# Altium PCB base_tiempo.PcbDoc (part 3 of 3)
Units mil, origin at the board's own origin, x right, y up, seen from the top; angles counter-clockwise.
Board outline 9832.52 x 6640 mil, 2 copper layers (Top Layer, Bottom Layer); 185 components, 479 nets, 1064 pads, 206 vias.
Unrouted connection lines stored in the file: 3.
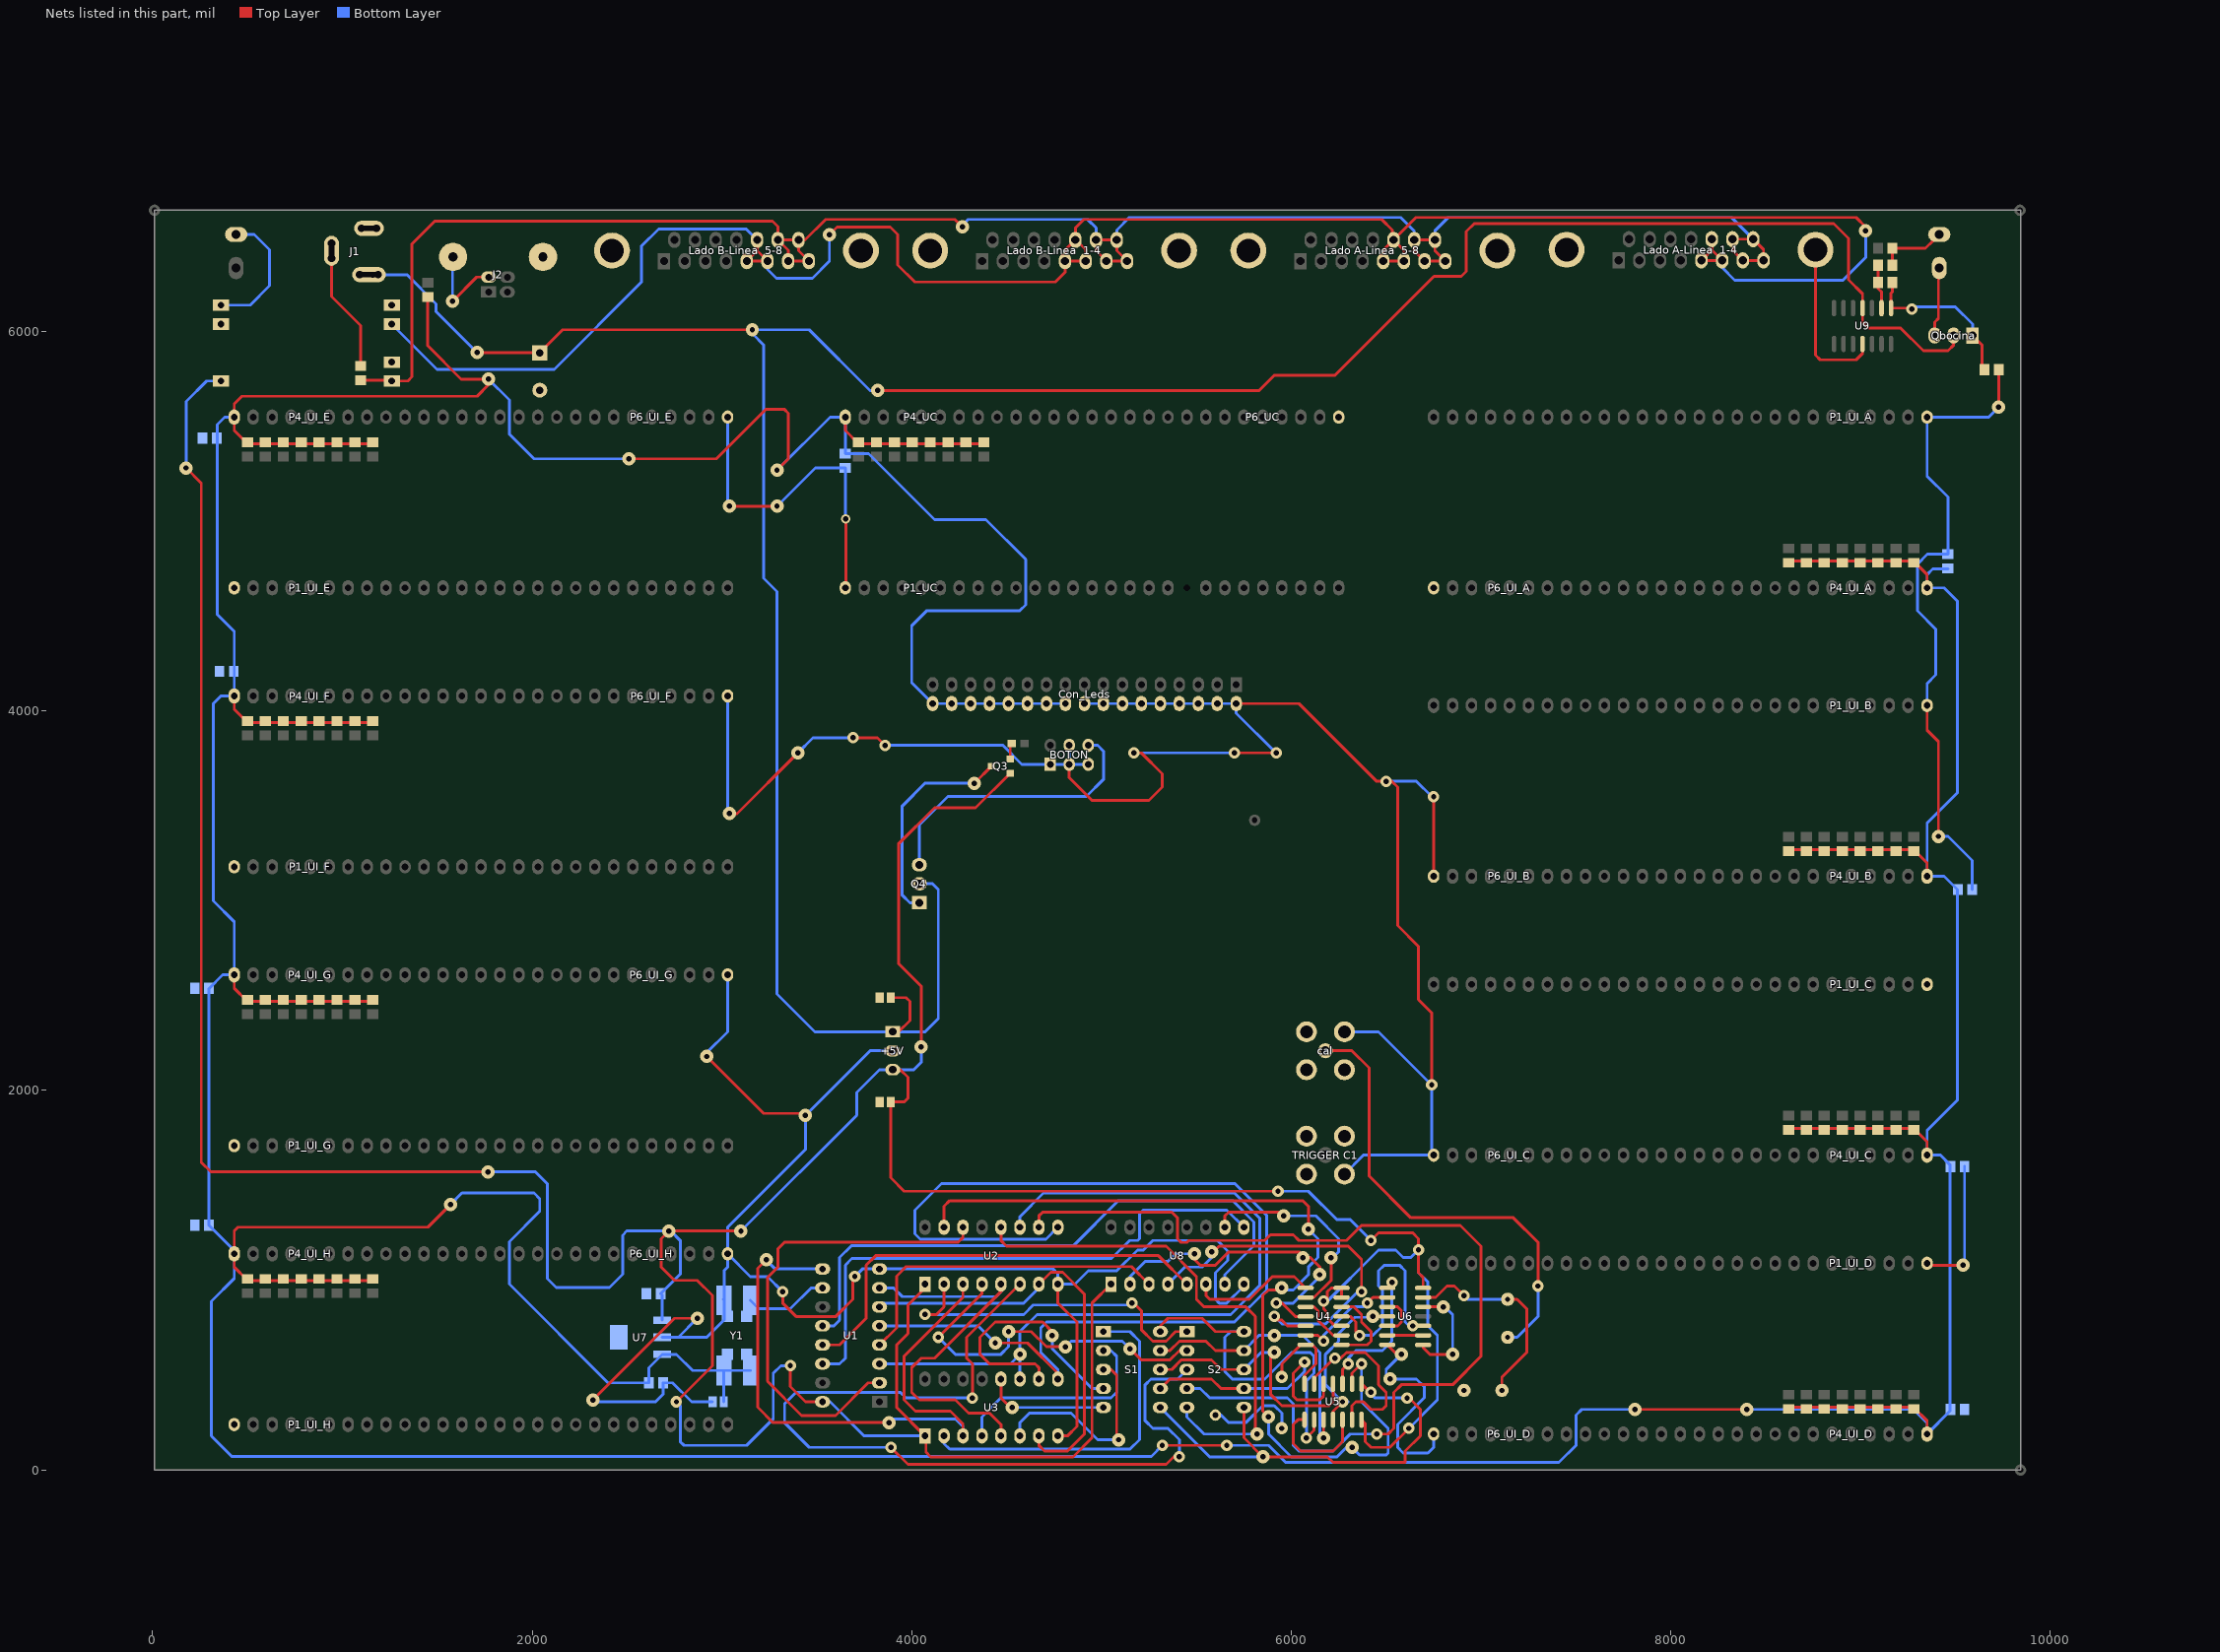
[diagram p3: the nets of this part, all layers, seen from the top]

## Via types
v1: diameter 70, hole 28, Top Layer to Bottom Layer, 157 vias
v2: diameter 60, hole 28, Top Layer to Bottom Layer, 46 vias
v3: diameter 65, hole 28, Top Layer to Bottom Layer, 2 vias
v4: diameter 50, hole 28, Top Layer to Bottom Layer, 1 vias

## Nets (pads, with @x,y where several pads share a name; then routed paths per layer and width w, separated by ;. In a path a pad name is that pad's centre, name@x,y a point inside that pad or via, vN(x,y) a via of type N, cw(c..) or ccw(c..) an arc to the next point about the centre after c; other vN are vias at no path point) (continued)
+3.3V: C5.1 C_Osc.1 CAL1_UC.1 CAL1_UI_A.1 CAL1_UI_B.1 CAL1_UI_C.1 CAL1_UI_D.1 CAL1_UI_E.1 CAL1_UI_F.1 CAL1_UI_G.1 CAL1_UI_H.1 Con_Leds.20 Con_Leds.22 Con_Leds.24 Con_Leds.26 Con_Leds.28 Con_Leds.30 Con_Leds.32 Con_Leds.34 P4_UC.9 P4_UI_A.9 P4_UI_B.9 P4_UI_C.9 P4_UI_D.9 P4_UI_E.9 P4_UI_F.9 P4_UI_G.9 P4_UI_H.9 pad.2@3029.58,609.11 R1_UC.2 R1_UI_A.2 R1_UI_B.2 R1_UI_C.2 R1_UI_D.2 R1_UI_E.2 R1_UI_F.2 R1_UI_G.2 R1_UI_H.2 R2_UC.2 R2_UI_A.2 R2_UI_B.2 R2_UI_C.2 R2_UI_D.2 R2_UI_E.2 R2_UI_F.2 R2_UI_G.2 R2_UI_H.2 R3_UC.2 R3_UI_A.2 R3_UI_B.2 R3_UI_C.2 R3_UI_D.2 R3_UI_E.2 R3_UI_F.2 R3_UI_G.2 R3_UI_H.2 R4_UC.2 R4_UI_A.2 R4_UI_B.2 R4_UI_C.2 R4_UI_D.2 R4_UI_E.2 R4_UI_F.2 R4_UI_G.2 R4_UI_H.2 R5_UC.2 R5_UI_A.2 R5_UI_B.2 R5_UI_C.2 R5_UI_D.2 R5_UI_E.2 R5_UI_F.2 R5_UI_G.2 R5_UI_H.2 R6_UC.2 R6_UI_A.2 R6_UI_B.2 R6_UI_C.2 R6_UI_D.2 R6_UI_E.2 R6_UI_F.2 R6_UI_G.2 R6_UI_H.2 R7_UC.2 R7_UI_A.2 R7_UI_B.2 R7_UI_C.2 R7_UI_D.2 R7_UI_E.2 R7_UI_F.2 R7_UI_G.2 R7_UI_H.2 R8_UC.2 R8_UI_A.2 R8_UI_B.2 R8_UI_C.2 R8_UI_D.2 R8_UI_E.2 R8_UI_F.2 R8_UI_G.2 R8_UI_H.2 R_PU_USB.2 U7.3 Y1.1 Y1.4 | length 40338
  Top Layer w15: P4_UI_G.9@429.58,2609.11 429.58,2538.64 495.65,2472.58 499.58,2468.64 593.87,2468.64 876.72,2468.64 971.01,2468.64 R4_UI_G.2@1159.58,2468.64 ; P4_UI_F.9@429.58,4079.11 429.58,4008.64 495.65,3942.58 499.58,3938.64 688.15,3938.64 782.44,3938.64 876.72,3938.64 971.01,3938.64 R4_UI_F.2@1159.58,3938.64 ; R4_UI_H.2@1159.58,998.64 782.44,998.64 593.87,998.64 499.58,998.64 495.65,1002.58 429.58,1068.64 P4_UI_H.9@429.58,1139.11 429.58,1259.11 449.58,1279.11 1449.58,1279.11 v1(1569.58,1399.11) ; R4_UI_E.2@1159.58,5408.64 971.01,5408.64 876.72,5408.64 782.44,5408.64 593.87,5408.64 499.58,5408.64 495.65,5412.58 429.58,5478.64 P4_UI_E.9@429.58,5549.11 429.58,5619.11 469.58,5659.11 1709.58,5659.11 1769.58,5719.11 v1(1769.58,5749.11) 1625.89,5749.11 1449.58,5925.42 R_PU_USB.2@1449.58,6181.71 R_PU_USB.2@1449.58,6189.58 ; v1(2509.58,5329.11) 2969.58,5329.11 3229.58,5589.11 3329.58,5589.11 3349.58,5569.11 3349.58,5329.11 v1(3289.58,5269.11) ; P4_UC.9@3649.58,5549.11 3649.58,5478.64 3715.65,5412.58 3719.58,5408.64 3813.87,5408.64 3908.15,5408.64 4002.44,5408.64 4096.72,5408.64 4285.3,5408.64 R4_UC.2@4379.58,5408.64 ; v2(5319.58,129.11) v2(5659.58,129.11) ; v1(7809.58,319.11) v1(8399.58,319.11) ; R4_UI_D.2@8619.58,329.58 8996.72,329.58 9279.58,329.58 9283.52,325.65 9349.58,259.58 P4_UI_D.9@9349.58,189.11 ; R4_UI_C.2@8619.58,1799.58 8713.87,1799.58 8808.15,1799.58 8902.44,1799.58 8996.72,1799.58 9091.01,1799.58 9279.58,1799.58 9283.52,1795.65 9349.58,1729.58 P4_UI_C.9@9349.58,1659.11 ; R4_UI_B.2@8619.58,3269.58 8713.87,3269.58 8808.15,3269.58 9091.01,3269.58 9279.58,3269.58 9283.52,3265.65 9349.58,3199.58 P4_UI_B.9@9349.58,3129.11 ; R4_UI_A.2@8619.58,4789.58 8713.87,4789.58 8808.15,4789.58 8902.44,4789.58 8996.73,4789.58 9091.01,4789.58 9185.3,4789.58 9279.58,4789.58 9349.58,4719.58 P4_UI_A.9@9349.58,4649.11
  Bottom Layer w15: P4_UI_E.9@429.58,5549.11 379.58,5549.11 339.58,5509.11 339.58,4509.11 429.58,4419.11 P4_UI_F.9@429.58,4079.11 359.58,4079.11 319.58,4039.11 319.58,2999.11 429.58,2889.11 P4_UI_G.9@429.58,2609.11 369.58,2609.11 296.98,2536.51 CAL1_UI_H.1@296.98,1289.11 429.58,1156.51 P4_UI_H.9@429.58,1139.11 429.58,1009.11 309.58,889.11 309.58,179.11 417.08,71.61 5262.08,71.61 v2(5319.58,129.11) ; v1(1569.58,1399.11) 1629.58,1459.11 2009.58,1459.11 2039.58,1429.11 2039.58,1363.58 1879.58,1203.58 1879.58,979.11 2399.58,459.11 C5.1@2613.93,459.11 2613.93,538.73 U7.3@2683.76,608.56 2760.13,608.56 2844.62,524.07 Y1.1@3010.68,524.07 ; v1(1769.58,5749.11) 1879.58,5639.11 1879.58,5459.11 2009.58,5329.11 v1(2509.58,5329.11) ; C_Osc.1@3009.11,359.11 3009.11,522.5 Y1.1@3010.68,524.07 ; Y1.4@3148.48,524.07 Y1.1@3010.68,524.07 ; v1(3289.58,5269.11) 3569.58,5549.11 P4_UC.9@3649.58,5549.11 CAL1_UC.1@3649.58,5356.51 3772.18,5356.51 4119.58,5009.11 4389.58,5009.11 4599.58,4799.11 4599.58,4559.11 4569.58,4529.11 4079.58,4529.11 3999.58,4449.11 3999.58,4149.11 Con_Leds.34@4109.58,4039.11 Con_Leds.32@4209.58,4039.11 Con_Leds.30@4309.58,4039.11 Con_Leds.28@4409.58,4039.11 Con_Leds.26@4509.58,4039.11 Con_Leds.24@4609.58,4039.11 Con_Leds.22@4709.58,4039.11 Con_Leds.20@4809.58,4039.11 ; v2(5659.58,129.11) 5879.58,129.11 5969.58,39.11 7409.58,39.11 7499.58,129.11 7499.58,289.11 7529.58,319.11 v1(7809.58,319.11) ; v1(8399.58,319.11) 9279.58,319.11 9349.58,249.11 P4_UI_D.9@9349.58,189.11 9469.58,309.11 9469.58,319.11 9469.58,1609.11 9419.58,1659.11 P4_UI_C.9@9349.58,1659.11 9349.58,1789.11 9509.58,1949.11 9509.58,3059.11 9439.58,3129.11 P4_UI_B.9@9349.58,3129.11 9349.58,3409.11 9509.58,3569.11 9509.58,4579.11 9439.58,4649.11 P4_UI_A.9@9349.58,4649.11 9349.58,4719.11 9379.58,4749.11 CAL1_UI_A.1@9459.58,4749.11
/B0: S1.1 U3.2 | length 1833.8
  Bottom Layer w15: U3.2@4169.58,179.11 4169.58,139.11 4199.58,109.11 5149.58,109.11 5199.58,159.11 5199.58,679.11 5149.58,729.11 S1.1@5009.58,729.11
/B1: S1.2 U3.4 | length 1136.3
  Bottom Layer w15: U3.4@4369.58,179.11 4369.58,279.11 4469.58,379.11 5049.58,379.11 5079.58,409.11 5079.58,599.11 5049.58,629.11 S1.2@5009.58,629.11
/B2: S1.3 U3.6 | length 1085.3
  Top Layer w15: S1.3@5009.58,529.11 5049.58,529.11 5079.58,499.11 5079.58,169.11 v1(5089.58,159.11)
  Bottom Layer w15: U3.6@4569.58,179.11 4569.58,249.11 4619.58,299.11 4839.58,299.11 4979.58,159.11 v1@5079.58,159.11
/B3: S1.4 U3.10 | length 1369.8
  Top Layer w15: U3.10@4669.58,479.11 4669.58,539.11 4649.58,559.11 4409.58,559.11 4359.58,609.11 4359.58,699.11 4439.58,779.11 4689.58,779.11 4739.58,729.11 v1(4739.58,709.11)
  Bottom Layer w15: v1(4739.58,709.11) 4739.58,639.11 4949.58,429.11 S1.4@5009.58,429.11
/B4: S1.5 U3.12 | length 660.7
  Top Layer w15: U3.12@4469.58,479.11 4469.58,379.11 4519.58,329.11 v1(4529.58,329.11)
  Bottom Layer w15: v1(4529.58,329.11) S1.5@5009.58,329.11
B0: S2.1 U2.2 | length 1807.7
  Top Layer w15: v2(4069.58,819.11) 4129.58,819.11 4169.58,859.11 U2.2@4169.58,979.11 ; v2@5169.58,879.11 5209.58,839.11 5209.58,739.11 5269.58,679.11 5339.58,679.11 5389.58,729.11 S2.1@5449.58,729.11
  Bottom Layer w15: v2@4069.58,829.11 4079.58,819.11 4589.58,819.11 4639.58,869.11 5159.58,869.11 v2@5169.58,879.11
  other v2: 5159.58,879.11
B1: S2.2 U2.4 | length 1926.8
  Top Layer w15: v2(4139.58,699.11) 4369.58,929.11 U2.4@4369.58,979.11 ; v1(4509.58,729.11) 4629.58,729.11 4709.58,649.11 v1(4809.58,649.11) ; v1(5149.58,639.11) 5209.58,579.11 5359.58,579.11 5409.58,629.11 S2.2@5449.58,629.11
  Bottom Layer w15: v2(4139.58,699.11) 4229.58,609.11 4469.58,609.11 4509.58,649.11 v1(4509.58,729.11) ; v1(4809.58,649.11) 4839.58,679.11 5109.58,679.11 v1(5149.58,639.11)
B2: S2.3 U2.6 | length 4797.9
  Top Layer w15: v2(3889.58,119.11) 3979.58,29.11 5339.58,29.11 5379.58,69.11 v2(5409.58,69.11) ; v2(4319.58,379.11) 4319.58,559.11 4289.58,589.11 4289.58,699.11 U2.6@4569.58,979.11
  Bottom Layer w15: v2(3889.58,119.11) 3459.58,119.11 3329.58,249.11 3329.58,349.11 3389.58,409.11 3939.58,409.11 3969.58,379.11 v2(4319.58,379.11) ; v2(5409.58,69.11) 5409.58,159.11 5349.58,219.11 5269.58,219.11 5229.58,259.11 5229.58,449.11 5259.58,479.11 5399.58,479.11 S2.3@5449.58,529.11
B3: S2.4 U2.10 | length 5350.7
  Top Layer w15: U2.10@4669.58,1279.11 4669.58,1339.11 4689.58,1359.11 5369.58,1359.11 5399.58,1329.11 5399.58,1219.11 5419.58,1199.11 5449.58,1199.11 5459.58,1209.11 5859.58,1209.11 5889.58,1239.11 6009.58,1239.11 6039.58,1209.11 6289.58,1209.11 6369.58,1289.11 6889.58,1289.11 6999.58,1179.11 6999.58,599.11 6849.58,449.11 6579.58,449.11 6539.58,409.11 6539.58,219.11 6509.58,189.11 v2@6459.58,189.11
  Bottom Layer w15: S2.4@5449.58,429.11 5519.58,429.11 5569.58,379.11 5979.58,379.11 6009.58,349.11 6009.58,129.11 6039.58,99.11 6219.58,99.11 6309.58,189.11 v2@6459.58,189.11
  other v2: 6449.58,189.11
B4: S2.5 U2.12 | length 2723.3
  Top Layer w15: U2.12@4469.58,1279.11 4469.58,1209.11 4499.58,1179.11 5339.58,1179.11 5499.58,1019.11 5499.58,899.11 5539.58,859.11 5759.58,859.11 5809.58,809.11 v1@5809.58,189.11
  Bottom Layer w15: S2.5@5449.58,329.11 5449.58,279.11 5539.58,189.11 v1(5819.58,189.11)
B_0: U1.9 U2.3 U3.3 | length 3486.9
  Top Layer w15: v1(3232.58,1107.11) 3187.58,1062.11 3187.58,330.11 3268.58,249.11 v1(3879.58,249.11) ; U3.3@4269.58,179.11 4269.58,242.11 4202.58,309.11 4019.58,309.11 3959.58,369.11 3959.58,599.11 4269.58,909.11 U2.3@4269.58,979.11
  Bottom Layer w15: v1(3232.58,1107.11) 3280.58,1059.11 U1.9@3529.58,1059.11 ; v1(3879.58,249.11) v1@3899.58,269.11 ; v1@3879.58,269.11 v1@3899.58,269.11 ; U3.3@4269.58,179.11 4269.58,229.11 4229.58,269.11 v1@3899.58,269.11
B_1: U1.7 U2.5 U3.5 | length 2116.5
  Top Layer w15: U3.5@4469.58,179.11 4469.58,239.11 4409.58,299.11 4299.58,299.11 4229.58,369.11 4039.58,369.11 3999.58,409.11 3999.58,539.11 4049.58,589.11 4119.58,589.11 4469.58,939.11 U2.5@4469.58,979.11
  Bottom Layer w15: U1.7@3829.58,959.11 3903.58,959.11 3949.58,913.11 4444.58,913.11 4469.58,938.11 U2.5@4469.58,979.11
B_2: U1.6 U2.7 U3.7 | length 2292.1
  Top Layer w15: U3.7@4669.58,179.11 4669.58,129.11 4699.58,99.11 4819.58,99.11 4909.58,189.11 4909.58,926.61 4794.58,1041.61 4732.08,1041.61 U2.7@4669.58,979.11
  Bottom Layer w15: U1.6@3829.58,859.11 3849.58,879.11 4589.58,879.11 4669.58,959.11 U2.7@4669.58,979.11
B_3: U1.5 U2.9 U3.9 | length 5942.5
  Top Layer w15: v1(4439.58,669.11) 4609.58,669.11 4769.58,509.11 U3.9@4769.58,479.11
  Bottom Layer w15: U1.5@3829.58,759.11 4349.58,759.11 v1(4439.58,669.11) ; U3.9@4769.58,479.11 4769.58,529.11 4679.58,619.11 4679.58,749.11 4709.58,779.11 5699.58,779.11 5869.58,949.11 5869.58,1342.11 5702.58,1509.11 4156.58,1509.11 4016.58,1369.11 4016.58,1244.11 4044.58,1216.11 4706.58,1216.11 U2.9@4769.58,1279.11
B_4: pad.2@3129.58,609.11 pad.2@3129.58,809.11 U1.3 U2.11 U3.11 | length 4153.5
  Bottom Layer w15: U1.3@3829.58,559.11 4519.58,559.11 v1(4569.58,609.11) ; U3.11@4569.58,479.11 4569.58,729.11 4659.58,819.11 5679.58,819.11 5832.58,972.11 5832.58,1326.61 5700.08,1459.11 4694.58,1459.11 4569.58,1334.11 U2.11@4569.58,1279.11
B_5: U1.2 U2.14 | length 2510.7
  Top Layer w15: U1.2@3829.58,459.11 3769.58,459.11 3597.58,287.11 3419.59,287.11 3239.58,467.11 3239.58,1014.59 3293.91,1068.92 3293.91,1164.85 3329.17,1200.11 4244.58,1200.11 4269.58,1225.11 U2.14@4269.58,1279.11
B_6: U1.4 U8.3 | length 1788.8
  Top Layer w15: U1.4@3829.58,659.11 3919.58,749.11 3919.58,1021.61 3969.58,1071.61 5157.08,1071.61 U8.3@5249.58,979.11
B_7: U1.13 U8.5 | length 2340.8
  Top Layer w15: U1.13@3529.58,659.11 3619.58,659.11 3759.58,799.11 3759.58,1079.11 3809.58,1129.11 5299.58,1129.11 U8.5@5449.58,979.11
B_8: U1.12 U8.7 | length 3177.5
  Bottom Layer w15: U1.12@3529.58,759.11 3589.58,759.11 3619.58,789.11 3619.58,1119.11 3681.58,1181.11 4850.58,1181.11 5088.58,1419.11 5690.58,1419.11 5802.58,1307.11 5802.58,1182.11 5649.58,1029.11 U8.7@5649.58,979.11
B_9: U1.14 U8.9 | length 2956
  Bottom Layer w15: U1.14@3529.58,559.11 3619.58,559.11 3649.58,589.11 3649.58,1079.11 3684.58,1114.11 5052.58,1114.11 5147.58,1209.11 5189.58,1209.11 5199.58,1219.11 5199.58,1349.11 5219.58,1369.11 5659.58,1369.11 U8.9@5749.58,1279.11
BOCINA: BOCINA.2B Qbocina.3 | length 303.8
  Top Layer w15: Qbocina.3@9389.58,5979.11 9389.58,6049.11 9409.58,6069.11 9409.58,6274.62
CLK: U1.10 Y1.3 | length 445.3
  Bottom Layer w15: Y1.3@3148.48,894.15 3193.52,849.11 3359.58,849.11 3469.58,959.11 U1.10@3529.58,959.11
GND: "Lado A-Linea  1-4.16" "Lado A-Linea  1-4.17" "Lado A-Linea  5-8.16" "Lado A-Linea  5-8.17" "Lado B-Linea  1-4.16" "Lado B-Linea  1-4.17" "Lado B-Linea  5-8.16" "Lado B-Linea  5-8.17" "TRIGGER C1.2" "TRIGGER C1.3" "TRIGGER C1.4" "TRIGGER C1.5" +5V.2 BOCINA.1A BOTON.1 BOTON.2 BOTON.3 BOTON.5 C1.2 C2.2 C3.2 C4.2 C5.2 C_Osc.2 CAL1_UC.2 CAL1_UI_A.2 CAL1_UI_B.2 CAL1_UI_C.2 CAL1_UI_D.2 CAL1_UI_E.2 CAL1_UI_F.2 CAL1_UI_G.2 CAL1_UI_H.2 cal.2 cal.3 cal.4 cal.5 CENTRADA.2 Con_Leds.2 Con_Leds.4 Con_Leds.6 Con_Leds.8 Con_Leds.10 Con_Leds.12 Con_Leds.14 Con_Leds.16 Con_Leds.18 J1.2 J1.2A J1.2B J1.3 J1.3A J1.3B J2.4 J2.5 J2.6 J_3.1 P1_UC.1 P1_UI_A.1 P1_UI_B.1 P1_UI_C.1 P1_UI_D.1 P1_UI_E.1 P1_UI_F.1 P1_UI_G.1 P1_UI_H.1 P6_UC.1 P6_UI_A.1 P6_UI_B.1 P6_UI_C.1 P6_UI_D.1 P6_UI_E.1 P6_UI_F.1 P6_UI_G.1 P6_UI_H.1 pad.2@3029.58,809.11 pad.2@3649.58,4649.11 pad.2@5599.58,289.11 pad.4 pad.7 pad.10@6749.58,4649.11 pad.13@9349.58,4029.11 pad.16@6749.58,3129.11 pad.17@942.73,6399.11 pad.18@942.73,6409.11 pad.19 pad.20@942.73,6425.72 pad.21@942.73,6429.11 pad.22 pad.23 pad.24@1119.58,6543.83 pad.25@1129.58,6543.83 pad.26 pad.27@1149.58,6543.83 pad.28@1159.58,6543.83 pad.31 pad.34 pad.37 pad.40 pad.42 pad.45 pad.47 pad.50 r9.2 r10.1 R12.2 Start.1A U1.8 U2.8 U3.8 U4.7 U5.7 U6.7 U7.2 U7.4 U8.8 U9.11 Y1.2 | length 31187.7
  Top Layer w15: pad.17@942.73,6399.11 J1.3B@942.73,6386.35 942.73,6184.27 1096,6031 R12.2@1096,5818.4 ; v1(1579.58,6159.11) 1707.38,6286.91 J2.4@1770.37,6286.91 ; v1(2319.58,369.11) 2749.58,799.11 v1(2869.58,799.11) ; v1(2919.58,2179.11) 3219.58,1879.11 3429.58,1879.11 v1(3439.58,1869.11) ; v1@3029.58,5079.11 v1(3039.58,5079.11) v1(3289.58,5079.11) ; v1(3039.58,3459.11) 3079.58,3459.11 v1(3399.58,3779.11) ; v2(3319.58,939.11) 3319.58,879.11 3389.58,809.11 3599.58,809.11 3689.58,899.11 3689.58,1009.11 v2(3699.58,1019.11) ; pad.2@3649.58,4649.11 3652.16,4651.69 v4(3652.16,5013) ; v2(3689.58,3859.11) 3819.58,3859.11 v2(3859.58,3819.11) ; U3.8@4769.58,179.11 4819.58,179.11 4869.58,229.11 4869.58,779.11 4769.58,879.11 U2.8@4769.58,979.11 ; BOTON.2@4829.58,3719.11 4829.58,3649.11 4949.58,3529.11 5249.58,3529.11 5319.58,3599.11 5319.58,3669.11 5209.58,3779.11 v2(5169.58,3779.11) ; v2(5699.58,3779.11) v2(5919.58,3779.11) ; Con_Leds.2@5709.58,4039.11 6039.58,4039.11 6449.58,3629.11 v2(6499.58,3629.11) 6529.58,3629.11 6559.58,3599.11 6559.58,2869.11 6669.58,2759.11 6669.58,2479.11 6739.58,2409.11 v2(6739.58,2029.11) v2@6749.58,2019.11 ; v3(5949.58,489.11) 5949.58,559.11 6049.58,659.11 U4.7@6075.09,659.11 6109.58,659.11 6129.58,639.11 6129.58,559.11 6069.58,499.11 U5.7@6069.58,453.6 ; U6.7@6489.58,659.11 U6.7@6505.09,659.11 6555.09,609.11 v1(6579.58,609.11) ; pad.16@6749.58,3129.11 v2(6749.58,3549.11) ; 8761.91,6430.92 8761.91,5875.09 8786,5851 8976,5851 9009.58,5884.58 U9.11@9009.58,5934.62 ; r9.2@9166.98,6349.11 r10.1@9166.98,6439.11 9341.48,6439.11 BOCINA.1A@9381.79,6479.42 ; pad.26@9349.58,1089.11 9359.58,1079.11 v1(9539.58,1079.11) ; pad.13@9349.58,4029.11 9349.58,3899.11 9409.58,3839.11 v1(9409.58,3339.11) ; v1(9726.98,5601.98) C3.2@9726.98,5799.11
  Bottom Layer w15: J_3.1@359.58,6139.11 514.11,6139.11 616,6241 616,6431 535.37,6511.63 Start.1A@439.58,6511.63 ; v1(1579.58,6159.11) 1579.58,6390.61 J2.5@1582.57,6393.6 ; v1(2319.58,369.11) 2329.58,359.11 2649.58,359.11 2688.73,398.26 C5.2@2688.73,459.11 2739.58,459.11 2839.58,359.11 C_Osc.2@2950.05,359.11 ; U7.2@2683.76,699.11 2769.58,699.11 ; v1(2869.58,799.11) 2769.58,699.11 ; v1(2919.58,2179.11) 2919.58,2199.11 3029.58,2309.11 pad.40@3029.58,2609.11 ; Y1.2@3005.72,899.11 Y1.2@3010.68,894.15 ; pad.45@3029.58,4079.11 3029.58,3469.11 v1(3039.58,3459.11) ; v1@3029.58,5079.11 pad.50@3029.58,5549.11 ; v1(3289.58,5079.11) 3492.18,5281.71 CAL1_UC.2@3649.58,5281.71 3649.58,5015.58 v4(3652.16,5013) ; v2(3319.58,939.11) 3239.58,1019.11 3149.58,1019.11 pad.34@3029.58,1139.11 ; v1(3399.58,3779.11) 3479.58,3859.11 v2(3689.58,3859.11) ; v2(3699.58,1019.11) 3739.58,1059.11 U1.8@3829.58,1059.11 4744.58,1059.11 4769.58,1034.11 U2.8@4769.58,979.11 4859.58,979.11 4929.58,1049.11 5079.58,1049.11 5189.58,1159.11 5219.58,1159.11 5269.58,1209.11 5609.58,1209.11 5664.58,1154.11 5664.58,1104.11 5599.58,1039.11 5599.58,899.11 5619.58,879.11 5659.58,879.11 5749.58,969.11 U8.8@5749.58,979.11 ; v2(3859.58,3819.11) 4479.58,3819.11 4579.58,3719.11 BOTON.1@4729.58,3719.11 BOTON.2@4829.58,3719.11 ; +5V.2@3899.58,2209.11 3779.58,2209.11 v1(3439.58,1869.11) 3439.58,1689.11 3029.58,1279.11 pad.34@3029.58,1139.11 ; BOTON.5@4829.58,3819.11 BOTON.2@4829.58,3719.11 ; Con_Leds.18@4909.58,4039.11 Con_Leds.16@5009.58,4039.11 Con_Leds.14@5109.58,4039.11 Con_Leds.12@5209.58,4039.11 Con_Leds.10@5309.58,4039.11 Con_Leds.8@5409.58,4039.11 Con_Leds.6@5509.58,4039.11 Con_Leds.4@5609.58,4039.11 Con_Leds.2@5709.58,4039.11 5709.58,3989.11 v2(5919.58,3779.11) ; BOTON.3@4929.58,3719.11 BOTON.2@4829.58,3719.11 ; v2(5169.58,3779.11) v2(5699.58,3779.11) ; pad.2@5599.58,289.11 5629.58,289.11 5669.58,249.11 5759.58,249.11 5849.58,339.11 5909.58,339.11 5949.58,299.11 v3(5949.58,219.11) ; 6279.58,1559.11 6379.58,1659.11 pad.22@6749.58,1659.11 6739.58,1669.11 v2(6739.58,2029.11) 6459.58,2309.11 cal.5@6279.58,2309.11 ; v2(6499.58,3629.11) 6659.58,3629.11 6739.58,3549.11 v2(6749.58,3549.11) ; v1(6579.58,609.11) 6499.58,529.11 6499.58,479.11 v1(6519.58,479.11) 6659.58,479.11 6699.58,439.11 6699.58,379.11 6559.58,239.11 6559.58,119.11 6589.58,89.11 6719.58,89.11 6749.58,119.11 pad.23@6749.58,189.11 ; pad.13@9349.58,4029.11 9349.58,4144.58 9396,4191 9396,4431 9299,4528 9299,4774 9351.51,4826.51 CAL1_UI_A.2@9459.58,4826.51 9459.58,5127.42 9349.58,5237.42 pad.7@9349.58,5549.11 9674.11,5549.11 v1(9726.98,5601.98) ; v1(9409.58,3339.11) 9459.58,3339.11 9586.98,3211.71 CAL1_UI_B.2@9586.98,3059.11 ; v1(9539.58,1079.11) 9546.98,1086.51 CAL1_UI_C.2@9546.98,1599.11 ; 2769.58,699.11 2919.58,699.11 3010.68,790.21 Y1.2@3010.68,894.15 ; Y1.2@3010.68,894.15 3010.68,1050.21 3029.58,1069.11 pad.34@3029.58,1139.11
GND_ISO: "Lado A-Linea  1-4.7" "Lado A-Linea  1-4.8" "Lado A-Linea  1-4.14" "Lado A-Linea  1-4.15" "Lado A-Linea  5-8.7" "Lado A-Linea  5-8.8" "Lado A-Linea  5-8.14" "Lado A-Linea  5-8.15" "Lado B-Linea  1-4.7" "Lado B-Linea  1-4.8" "Lado B-Linea  1-4.14" "Lado B-Linea  1-4.15" "Lado B-Linea  5-8.7" "Lado B-Linea  5-8.8" "Lado B-Linea  5-8.14" "Lado B-Linea  5-8.15" J_7.1 R12.1 | length 10252.4
  Top Layer w15: R12.1@1096,5743.6 1255.09,5743.6 J_7.1@1259.58,5739.11 1344.11,5739.11 1366,5761 1366,6461 1486,6581 3266,6581 3294.11,6552.89 3294.11,6482.89 3348.64,6428.36 3348.64,6371.08 3457.69,6371.08 3403.17,6425.61 3403.17,6482.89 ; 3296,6481 3297.89,6482.89 3403.17,6482.89 ; v1(4266,6551) 4226,6591 3546,6591 3437.89,6482.89 3403.17,6482.89 ; 4966,6481 4967.89,6482.89 4970.78,6482.89 ; 6646,6481 6646,6427.05 6701.97,6371.08 6811.03,6371.08 6756.5,6425.61 6756.5,6482.89 6647.44,6482.89 ; 8324.11,6486.83 8326,6486.83 ; 8326,6491 8326,6486.83 ; 4970.78,6482.89 5079.83,6482.89 5079.83,6425.61 5134.36,6371.08 5025.3,6371.08 4970.78,6425.61 4970.78,6482.89 ; 8326,6486.83 8326,6427.65 8378.64,6375.02 8487.69,6375.02 8487.69,6432.3 8433.16,6486.83 8326,6486.83
  Bottom Layer w15: v1(4266,6551) 4266,6561 4296,6591 4926,6591 4970.78,6546.22 4970.78,6482.89 ; 5079.83,6482.89 5079.83,6534.83 5146,6601 6576,6601 6647.44,6529.56 6647.44,6482.89 ; 6756.5,6482.89 6756.5,6531.5 6826,6601 8318.99,6601 8433.16,6486.83
NetC3_1: C3.1 Qbocina.1 R11.2 U9.1 | length 877.8
  Top Layer w15: R11.2@9166.98,6259.11 9166.98,6209.11 9159.58,6201.71 U9.1@9159.58,6123.6 9265.09,6123.6 v2(9269.58,6119.11) ; Qbocina.1@9589.58,5979.11 9639.58,5929.11 9639.58,5811.71 C3.1@9652.18,5799.11
  Bottom Layer w15: v2(9269.58,6119.11) 9279.58,6129.11 9499.58,6129.11 9589.58,6039.11 Qbocina.1@9589.58,5979.11
NetJ_2_1: J_2.1
NetJ_4_1: J_4.1
NetJ_6_1: J_6.1
NetQ3_2: Q3.2 R_BOTON.1 | length 85.6
  Top Layer w15: Q3.2@4518.79,3746.51 4518.79,3821.79 R_BOTON.1@4526.12,3829.11
NetQ3_3: Q3.3 Q4.1 | length 1134.3
  Top Layer w15: v1(4329.58,3619.11) 4330.37,3619.11 Q3.3@4420.37,3709.11
  Bottom Layer w15: Q4.1@4039.58,2989.11 3989.58,2989.11 3949.58,3029.11 3949.58,3499.11 4069.58,3619.11 v1(4329.58,3619.11)
Netr9_1: r9.1 R11.1 U9.2 | length 232.7
  Top Layer w15: r9.1@9092.18,6349.11 R11.1@9092.18,6259.11 9092.18,6226.51 9109.58,6209.11 U9.2@9109.58,6123.6
NetU4_3: U4.3 U4.9 | length 280.4
  Top Layer w15: U4.3@6075.09,859.11 6119.58,859.11 6139.58,839.11 6139.58,789.11 6219.58,709.11 U4.9@6264.07,709.11
NetU4_6: U4.6 U6.2 | length 555.3
  Top Layer w15: U4.6@6075.09,709.11 6139.58,709.11 v2(6169.58,679.11) ; v2(6399.58,879.11) 6429.58,909.11 U6.2@6505.09,909.11
  Bottom Layer w15: v2(6169.58,679.11) 6169.58,709.11 6319.58,859.11 6379.58,859.11 v2(6399.58,879.11)
NetU4_8: U4.8 U4.12 | length 446.6
  Top Layer w15: U4.8@6264.07,659.11 6399.58,659.11 6419.58,679.11 6419.58,729.11 6369.58,779.11 6369.58,819.11 6329.58,859.11 U4.12@6264.07,859.11
NetU4_11: U4.11 U6.10 | length 1088.4
  Top Layer w15: U4.11@6264.07,809.11 6309.58,809.11 6339.58,779.11 6339.58,729.11 v2(6359.58,709.11)
  Bottom Layer w15: v2(6359.58,709.11) 6429.58,709.11 6479.58,759.11 6479.58,949.11 6459.58,969.11 6459.58,1049.11 6489.58,1079.11 6569.58,1079.11 6599.58,1049.11 6599.58,779.11 6619.58,759.11 v2(6639.58,759.11)
NetU5_3: U5.3 U6.1 | length 737.1
  Top Layer w15: U5.3@6269.58,453.6 6269.58,529.11 v2(6299.58,559.11) ; U6.1@6505.09,959.11 U6.1@6509.58,963.6 ; v2@6529.58,983.6 v2(6529.58,989.11)
  Bottom Layer w15: v2(6299.58,559.11) 6299.58,589.11 6339.58,629.11 6479.58,629.11 6529.58,679.11 v2(6529.58,989.11)
NetU5_6: U5.6 U5.13 | length 969.3
  Top Layer w15: U5.6@6119.58,453.6 6119.58,483.62 6225.07,589.11 6259.58,589.11 6289.58,619.11 6389.58,619.11 6459.58,549.11 6459.58,449.11 6499.58,409.11 6499.58,339.11 6479.58,319.11 6419.58,319.11 6379.58,359.11 6339.58,359.11 6319.58,339.11 U5.13@6319.58,264.62
  other v2: 6229.58,589.11
NetU5_8: U5.8 U5.12 | length 583.4
  Top Layer w15: U5.8@6069.58,264.62 6035.09,264.62 6009.58,239.11 6009.58,139.11 6049.58,99.11 6219.58,99.11 6269.58,149.11 U5.12@6269.58,264.62
NetU5_11: U5.11 U6.4 | length 867.2
  Top Layer w15: U5.11@6219.58,264.62 6219.58,309.11 v2(6269.58,359.11) ; v1@6409.58,809.11 U6.4@6505.09,809.11
  Bottom Layer w15: 6299.58,359.11 v2(6269.58,359.11) 6179.58,449.11 6179.58,609.11 6249.58,679.11 6249.58,719.11 6334.58,804.11 v1@6404.58,804.11 ; v1@6419.58,809.11 v1(6429.58,809.11)
NetU6_3: U6.3 U6.5 | length 225.5
  Top Layer w15: U6.5@6505.09,759.11 6559.58,759.11 6579.58,779.11 6579.58,839.11 6559.58,859.11 U6.3@6505.09,859.11
NetU6_6: U6.6 U6.9 | length 189
  Top Layer w15: U6.6@6505.09,709.11 U6.9@6694.07,709.11
NetU6_8: U6.8 U6.12 | length 566.8
  Top Layer w15: U6.8@6694.07,659.11 6694.07,644.62 6729.58,609.11 v1(6849.58,609.11) ; U6.12@6694.07,859.11 v1(6799.58,859.11)
  Bottom Layer w15: v1(6799.58,859.11) 6809.58,859.11 6849.58,819.11 v1(6849.58,609.11)
NetU6_13: U6.13 W1.2 W2.2 | length 1103.9
  Top Layer w15: U6.13@6694.07,909.11 6759.58,909.11 6819.58,969.11 6859.58,969.11 v2(6909.58,919.11) ; W2.2@7109.58,419.11 7109.58,489.11 7239.58,619.11 7239.58,849.11 7189.58,899.11 W1.2@7139.58,899.11
  Bottom Layer w15: v2(6909.58,919.11) 6929.58,899.11 W1.2@7139.58,899.11
Q_0: S1.10 S2.10 U5.9 | length 1919.5
  Top Layer w15: S1.10@5309.58,729.11 5309.58,759.11 5349.58,799.11 5529.58,799.11 5599.58,729.11 S2.10@5749.58,729.11 ; v2(6079.58,169.11) 6119.58,209.11 U5.9@6119.58,264.62
  Bottom Layer w15: S2.10@5749.58,729.11 5679.58,729.11 5649.58,699.11 5649.58,519.11 5689.58,479.11 5859.58,479.11 5999.58,619.11 6099.58,619.11 6119.58,599.11 6119.58,509.11 6079.58,469.11 v2(6079.58,169.11)
Q_1: S1.9 S2.9 U5.10 | length 1525.6
  Top Layer w15: S1.9@5309.58,629.11 5359.58,629.11 5409.58,679.11 5549.58,679.11 5599.58,629.11 S2.9@5749.58,629.11 ; v1@6149.58,159.11 6169.58,179.11 U5.10@6169.58,264.62
  Bottom Layer w15: S2.9@5749.58,629.11 5829.58,709.11 6059.58,709.11 6149.58,619.11 v1@6149.58,159.11
  other v1: 6169.58,169.11 5909.58,709.11
Q_2: S1.8 S2.8 U5.4 | length 1394.6
  Top Layer w15: S1.8@5309.58,529.11 5369.58,529.11 5419.58,579.11 5579.58,579.11 5629.58,529.11 S2.8@5749.58,529.11 ; v1@5919.58,629.11 5909.58,629.11 v1(5909.58,619.11) 5889.58,599.11 5889.58,399.11 5949.58,339.11 6199.58,339.11 6219.58,359.11 U5.4@6219.58,453.6
  Bottom Layer w15: S2.8@5749.58,529.11 5839.58,619.11 v1(5909.58,619.11) v1@5909.58,609.11
Q_3: S1.7 S2.7 U5.5 | length 1334.6
  Top Layer w15: S1.7@5309.58,429.11 5359.58,479.11 5579.58,479.11 5629.58,429.11 S2.7@5749.58,429.11 ; v2(6069.58,569.11) 6009.58,509.11 6009.58,389.11 6029.58,369.11 6149.58,369.11 6169.58,389.11 U5.5@6169.58,453.6
  Bottom Layer w15: S2.7@5749.58,429.11 5979.58,429.11 6069.58,519.11 v2(6069.58,569.11)
Q_4: S1.6 S2.6 U5.1 | length 2379
  Top Layer w15: S2.6@5739.58,319.11 5749.58,309.11 5749.58,169.11 v1(5849.58,69.11) 6189.58,69.11 6219.58,39.11 6599.58,39.11 6599.58,99.11 6679.58,179.11 6679.58,319.11 6619.58,379.11 v2(6609.58,379.11) ; U5.1@6369.58,453.6 v2@6424.07,399.11
  Bottom Layer w15: S1.6@5309.58,329.11 5569.58,69.11 v1(5849.58,69.11) ; v2(6419.58,409.11) 6419.58,399.11 6439.58,379.11 v2@6589.58,379.11
Q_5: U2.15 U5.2 | length 4845.5
  Top Layer w15: U2.15@4169.58,1279.11 4169.58,1389.11 4199.58,1419.11 6059.58,1419.11 6089.58,1389.11 v1(6089.58,1269.11) ; v1@5869.58,289.11 5849.58,309.11 5849.58,919.11 5879.58,949.11 v1@5949.58,949.11 ; U5.2@6319.58,453.6 6319.58,509.11 v2(6369.58,559.11)
  Bottom Layer w15: v1(5879.58,279.11) 5879.58,189.11 5999.58,69.11 6239.58,69.11 6289.58,119.11 v1(6319.58,119.11) 6359.58,79.11 6499.58,79.11 6509.58,89.11 6509.58,219.11 6369.58,359.11 v2(6369.58,559.11) ; v1@5949.58,949.11 6009.58,949.11 6089.58,1029.11 6089.58,1069.11 6139.58,1119.11 6139.58,1219.11 v1(6089.58,1269.11)
  other v1: 5949.58,959.11
Q_6: U4.4 U8.2 | length 1692.6
  Top Layer w15: v1(5489.58,1139.11) 5489.58,1109.11 5519.58,1079.11 5599.58,1079.11 5669.58,1149.11 6039.58,1149.11 6069.58,1119.11 6099.58,1119.11 6149.58,1069.11 v1(6149.58,1029.11) ; v2(5919.58,879.11) 5949.58,879.11 6019.58,809.11 U4.4@6075.09,809.11
  Bottom Layer w15: U8.2@5149.58,979.11 5149.58,1019.11 5229.58,1099.11 5349.58,1099.11 5389.58,1139.11 v1(5489.58,1139.11) ; v2(5919.58,879.11) 6009.58,879.11 v1@6139.58,1009.11
  other v1: 6059.58,1119.11
Q_7: U4.5 U8.4 | length 2075
  Top Layer w15: v1(5579.58,1149.11) 5589.58,1149.11 5619.58,1179.11 6299.58,1179.11 6369.58,1109.11 v2(6369.58,939.11) ; v2(5909.58,809.11) 5929.58,789.11 5949.58,789.11 5979.58,759.11 U4.5@6075.09,759.11
  Bottom Layer w15: U8.4@5349.58,979.11 5439.58,1069.11 5529.58,1069.11 5599.58,1139.11 5589.58,1149.11 v1(5579.58,1149.11) ; v2(5909.58,809.11) 5949.58,769.11 6179.58,769.11 6349.58,939.11 v2(6369.58,939.11)
Q_8: U4.1 U8.6 | length 668.4
  Top Layer w15: U8.6@5549.58,979.11 5549.58,919.11 5569.58,899.11 5779.58,899.11 5899.58,1019.11 6015.09,1019.11 U4.1@6075.09,959.11
Q_9: U4.2 U8.10 | length 1140.5
  Top Layer w15: U8.10@5649.58,1279.11 5649.58,1339.11 5669.58,1359.11 5939.58,1359.11 v1(5959.58,1339.11) ; U4.2@6075.09,909.11 6119.58,909.11 6209.58,999.11 v1(6209.58,1119.11)
  Bottom Layer w15: v1(5959.58,1339.11) 6129.58,1339.11 6249.58,1219.11 6249.58,1149.11 6219.58,1119.11 v1(6209.58,1119.11)
TRIGGER_CAL: cal.1 W1.1 | length 2467.8
  Top Layer w15: cal.1@6179.58,2209.11 6319.58,2209.11 6409.58,2119.11 6409.58,1549.11 6629.58,1329.11 7169.58,1329.11 7299.58,1199.11 v2(7299.58,969.11)
  Bottom Layer w15: W1.1@7139.58,699.11 7189.58,699.11 7299.58,809.11 v2(7299.58,969.11)
VCC: +5V.3 C2.1 C4.1 J_1.1 Q3.1 U1.16 U2.1 U3.1 U4.10 U4.13 U4.14 U5.14 U6.14 U7.1 U8.1 W2.1 | length 24208.6
  Top Layer w15: v1(176,5281) 256,5201 256,1621 306,1571 v1(1766,1571) ; v2(2759.58,359.11) 2949.58,549.11 2949.58,919.11 2869.58,999.11 2749.58,999.11 2679.58,1069.11 2679.58,1219.11 v1(2719.58,1259.11) v1(3099.58,1259.11) ; v2(3359.58,549.11) 3359.58,439.11 3439.58,359.11 U1.16@3529.58,359.11 ; +5V.3@3899.58,2109.11 3939.58,2109.11 3979.58,2069.11 3979.58,1959.11 3959.58,1939.11 C2.1@3889.11,1939.11 3889.11,1539.58 3959.58,1469.11 v2(5929.58,1469.11) ; v1(4049.58,2229.11) 4049.58,2549.11 3929.58,2669.11 3929.58,3299.11 4119.58,3489.11 4336.2,3489.11 Q3.1@4518.79,3671.71 ; U3.1@4069.58,179.11 3919.58,329.11 3919.58,659.11 3979.58,719.11 3979.58,869.11 4069.58,959.11 U2.1@4069.58,979.11 ; U3.1@4074.58,174.11 4074.58,94.11 4099.58,69.11 4849.58,69.11 4949.58,169.11 4949.58,879.11 U8.1@5049.58,979.11 ; U4.10@6264.07,759.11 6229.58,759.11 6189.58,799.11 6189.58,829.11 6169.58,849.11 6169.58,869.11 6189.58,889.11 6189.58,939.11 6209.58,959.11 U4.14@6264.07,959.11 U4.13@6264.07,909.11 ; U5.14@6369.58,264.62 6389.58,244.62 6389.58,149.11 6419.58,119.11 6519.58,119.11 v2(6619.58,219.11) ; v2(6419.58,1209.11) 6459.58,1249.11 6639.58,1249.11 6669.58,1219.11 v2(6669.58,1159.11) 6669.58,1039.11 6694.07,1014.62 U6.14@6694.07,959.11
  Bottom Layer w15: v1(176,5281) 176,5631 284.11,5739.11 J_1.1@359.58,5739.11 ; v1(1766,1571) 2016,1571 2079,1508 2079,1008 2126,961 2406,961 2476,1031 2476,1237.22 2497.89,1259.11 v1(2719.58,1259.11) 2729.58,1259.11 2779.58,1209.11 2779.58,1031.71 C4.1@2676.98,929.11 ; U7.1@2683.76,789.66 C4.1@2683.76,922.34 ; v2(2759.58,359.11) 2779.58,339.11 2779.58,149.11 2799.58,129.11 3129.58,129.11 3269.58,269.11 3269.58,509.11 3309.58,549.11 v2(3359.58,549.11) ; v1(3099.58,1259.11) 3709.58,1869.11 3709.58,1989.11 3829.58,2109.11 +5V.3@3899.58,2109.11 4009.58,2109.11 4049.58,2149.11 v1(4049.58,2229.11) ; U1.16@3529.58,359.11 3569.58,359.11 3749.58,179.11 U3.1@4069.58,179.11 ; v2(5929.58,1469.11) 6089.58,1469.11 6239.58,1319.11 6309.58,1319.11 v2(6419.58,1209.11) ; v2@6169.58,869.11 6459.58,1159.11 6549.58,1159.11 6589.58,1119.11 6629.58,1119.11 v2(6669.58,1159.11) 6669.58,1039.11 6719.58,989.11 6719.58,759.11 6769.58,709.11 6769.58,369.11 v2(6619.58,219.11)
  other v2: 6169.58,889.11
VCC_BOTON: BOTON.6 Q4.3 | length 1521.8
  Bottom Layer w15: Q4.3@4039.58,3189.11 4039.58,3399.11 4189.58,3549.11 4919.58,3549.11 5009.58,3639.11 5009.58,3789.11 4979.58,3819.11 BOTON.6@4929.58,3819.11
VCC_EXT: +5V.1 C1.1 CENTRADA.1 J1.1 J1.1A J1.1B pad.9@1109.58,6299.74 pad.10@1119.58,6299.74 pad.11@1129.58,6299.74 pad.12@1139.58,6299.74 pad.13@1149.58,6299.74 pad.14@1149.58,6299.74 pad.15@1159.58,6299.11 pad.16@1169.58,6299.74 Q4.2 Qbocina.2 U9.4 | length 15515.4
  Top Layer w15: v1(1709.58,5889.11) 2039.58,5889.11 2159.58,6009.11 v1(3159.58,6009.11) ; v1(3819.58,5689.11) 5829.58,5689.11 5909.58,5769.11 6229.58,5769.11 6673.74,6213.26 ; C1.1@3889.11,2489.11 3969.58,2489.11 3989.58,2469.11 3989.58,2369.11 3929.58,2309.11 +5V.1@3899.58,2309.11 ; 6747.74,6287.27 6673.74,6213.26 ; Qbocina.2@9489.58,5979.11 9489.58,5929.11 9459.58,5899.11 9329.58,5899.11 9209.58,6019.11 9039.58,6019.11 9009.58,6049.11 U9.4@9009.58,6123.6 9009.58,6199.11 8936,6272.69 8936,6491 8857.89,6569.11 6964.11,6569.11 6921.85,6526.85 6921.85,6316.85 6896,6291 6751.47,6291 6673.74,6213.26
  Bottom Layer w15: pad.12@1139.58,6299.74 pad.14@1149.58,6299.74 pad.16@1169.58,6299.74 J1.1B@1188.79,6299.74 1338.95,6299.74 1493.42,6145.28 1493.42,6105.28 v1(1709.58,5889.11) v1@1699.58,5889.11 ; v1(3819.58,5689.11) 3779.58,5689.11 3459.58,6009.11 v1(3159.58,6009.11) 3159.58,5989.11 3219.58,5929.11 3219.58,4699.11 3289.58,4629.11 3289.58,2509.11 3489.58,2309.11 +5V.1@3899.58,2309.11 4069.58,2309.11 4139.58,2379.11 4139.58,3059.11 4109.58,3089.11 Q4.2@4039.58,3089.11
VCC_ISO: "Lado A-Linea  1-4.5" "Lado A-Linea  1-4.6" "Lado A-Linea  1-4.13" "Lado A-Linea  5-8.5" "Lado A-Linea  5-8.6" "Lado A-Linea  5-8.13" "Lado B-Linea  1-4.5" "Lado B-Linea  1-4.6" "Lado B-Linea  1-4.13" "Lado B-Linea  5-8.5" "Lado B-Linea  5-8.6" "Lado B-Linea  5-8.13" J_5.1 | length 11500.2
  Top Layer w15: 3185.06,6482.89 3185.06,6425.61 ; 3186,6481 3186,6426.55 3185.06,6425.61 ; v1(3566,6511) 3606,6551 3886,6551 3926,6511 3926,6351 4016,6261 4756,6261 4807.19,6312.19 4807.19,6371.08 ; 4866,6481 4916.25,6430.75 4916.25,6371.08 4807.19,6371.08 ; 6483.86,6371.08 6483.86,6428.36 6538.39,6482.89 ; 6486,6371 6592.84,6371 6592.92,6371.08 6592.92,6428.36 6538.39,6482.89 ; 8215.05,6486.83 8215.05,6429.54 8160.53,6375.02 8269.58,6375.02 8216,6428.6 8216,6481 ; v1(9026,6531) 9026,6551 8976,6601 6656.5,6601 6538.39,6482.89 ; 3185.06,6425.61 3239.58,6371.08 3130.53,6371.08 3185.06,6425.61 ; 4807.19,6371.08 4807.19,6428.36 4861.72,6482.89 4861.72,6545.28 4907.44,6591 6476,6591 6531.25,6535.75 6531.25,6490.03 6538.39,6482.89
  Bottom Layer w15: J_5.1@1259.58,6039.11 1497.69,5801 2116,5801 2576,6261 2576,6451 2666,6541 3126.94,6541 3185.06,6482.89 ; 3239.58,6371.08 3239.58,6327.42 3286,6281 3476,6281 3566,6371 v1(3566,6511) ; 8269.58,6375.02 8269.58,6337.42 8336,6271 8906,6271 9026,6391 v1(9026,6531)
pads on no net: Con_Leds.33 U1.1 U1.15 U2.13 U2.16 U3.13 U3.14 U3.15 U3.16 U8.11 U8.12 U8.13 U8.14 U8.15 U8.16 U9.5 U9.6 U9.7 U9.8 U9.9 U9.10 U9.12 U9.13 U9.14
copper on no net: | length 75742
  Top Layer w10: -362,-548 10538,-548 10538,7276 -362,7276
  Top Layer w15: -362,-548 -362,7276
  Bottom Layer w10: -380,-659 10671,-659 10671,7437 -380,7437 -380,-659

## Polygon pours and split planes (outlines as drawn)
GND on Top Layer "Top Layer" (solid, remove dead copper, pour order 4): 9.58,6639.11 9.58,-0.89 9842.1,-0.89 9842.1,6639.11 9.58,6639.11
GND on Bottom Layer "Bottom Layer" (solid, remove dead copper, pour order 3): 9.87,6642.19 9.87,2.19 9842.39,2.19 9842.39,6642.19 9.87,6642.19

## Other copper
Top Layer:
  pour cut-out: 4231.87,3424.31 4231.87,1749.11 5806.67,1749.11 5806.67,3424.31
Bottom Layer:
  pour cut-out: 4231.87,3424.31 4231.87,1749.11 5806.67,1749.11 5806.67,3424.31

## Silkscreen, mask and mechanical layers (free items; w line width, h text height)
Mechanical 1:
  lines w3.94: 4231.87,1749.11 5806.67,1749.11
  lines w10: 4231.87,1749.11 4231.87,3424.31 5806.67,3424.31 5806.67,1749.11
  lines w30: -0.42,-0.89 9839.58,-0.89 9839.58,6639.11 -0.42,6639.11 -0.42,-0.89

## Text inside footprints (layer, text, board x,y; h text height)
+5V: Top Overlay "1" at 3735.21,2318.95 h59.06 r270; Top Overlay "2" at 3735.21,2228.8 h59.06 r270; Top Overlay "3" at 3735.21,2128.8 h59.06 r270
BOTON: Top Overlay "6" at 5009.58,3799.11 h50; Top Overlay "3" at 5009.58,3699.11 h50; Top Overlay "1" at 4649.58,3699.11 h50; Top Overlay "4" at 4629.58,3799.11 h50
CENTRADA: Top Overlay "+" at 2009.58,5989.11 h59.06 r270
Con_Leds: Top Overlay "2" at 5829.58,4059.11 h50 r180; Top Overlay "1" at 5829.58,4159.11 h50 r180; Top Overlay "33" at 4049.58,4159.11 h50 r180; Top Overlay "34" at 4049.58,4059.11 h50 r180
J2: Mechanical 1 "PCB Edge" at 2042.08,6786.31 h9.84 r180
"Lado A-Linea  1-4": Top Overlay "9" at 7759.15,6609.07 h59.06; Top Overlay "15" at 8388.87,6609.07 h59.06; Top Overlay "8" at 8486,6235.06 h59.06; Top Overlay "1" at 7714.46,6235.06 h59.06
"Lado A-Linea  5-8": Top Overlay "1" at 6201.38,6235.06 h59.06; Top Overlay "5" at 6627.76,6235.06 h59.06; Top Overlay "9" at 6573.23,6605.13 h59.06; Top Overlay "6" at 6246.07,6605.13 h59.06
"Lado B-Linea  1-4": Top Overlay "1" at 4524.71,6235.06 h59.06; Top Overlay "5" at 4951.09,6235.06 h59.06; Top Overlay "9" at 4896.56,6605.13 h59.06; Top Overlay "6" at 4569.4,6605.13 h59.06
"Lado B-Linea  5-8": Top Overlay "1" at 2848.05,6235.06 h59.06; Top Overlay "5" at 3274.43,6235.06 h59.06; Top Overlay "9" at 3219.9,6605.13 h59.06; Top Overlay "6" at 2892.73,6605.13 h59.06
Q4: Top Overlay "3" at 4190.17,3169.42 h59.06 r90; Top Overlay "2" at 4190.17,3069.42 h59.06 r90; Top Overlay "1" at 4190.17,2979.27 h59.06 r90
Qbocina: Top Overlay "3" at 9409.27,6129.7 h59.06 r180; Top Overlay "2" at 9509.27,6129.7 h59.06 r180; Top Overlay "1" at 9599.42,6129.7 h59.06 r180
Start: Mechanical 1 "PCB Edge" at 621.39,6656 h9.84 r180